# Altium PCB USB下载线mega8贴片.PcbDoc
Units mm, origin at the board's own origin, x right, y up, seen from the top; angles counter-clockwise.
Board outline 152.4 x 101.6 mm, 2 copper layers (Top Layer, Bottom Layer); 17 components, 22 nets, 76 pads, 20 vias.
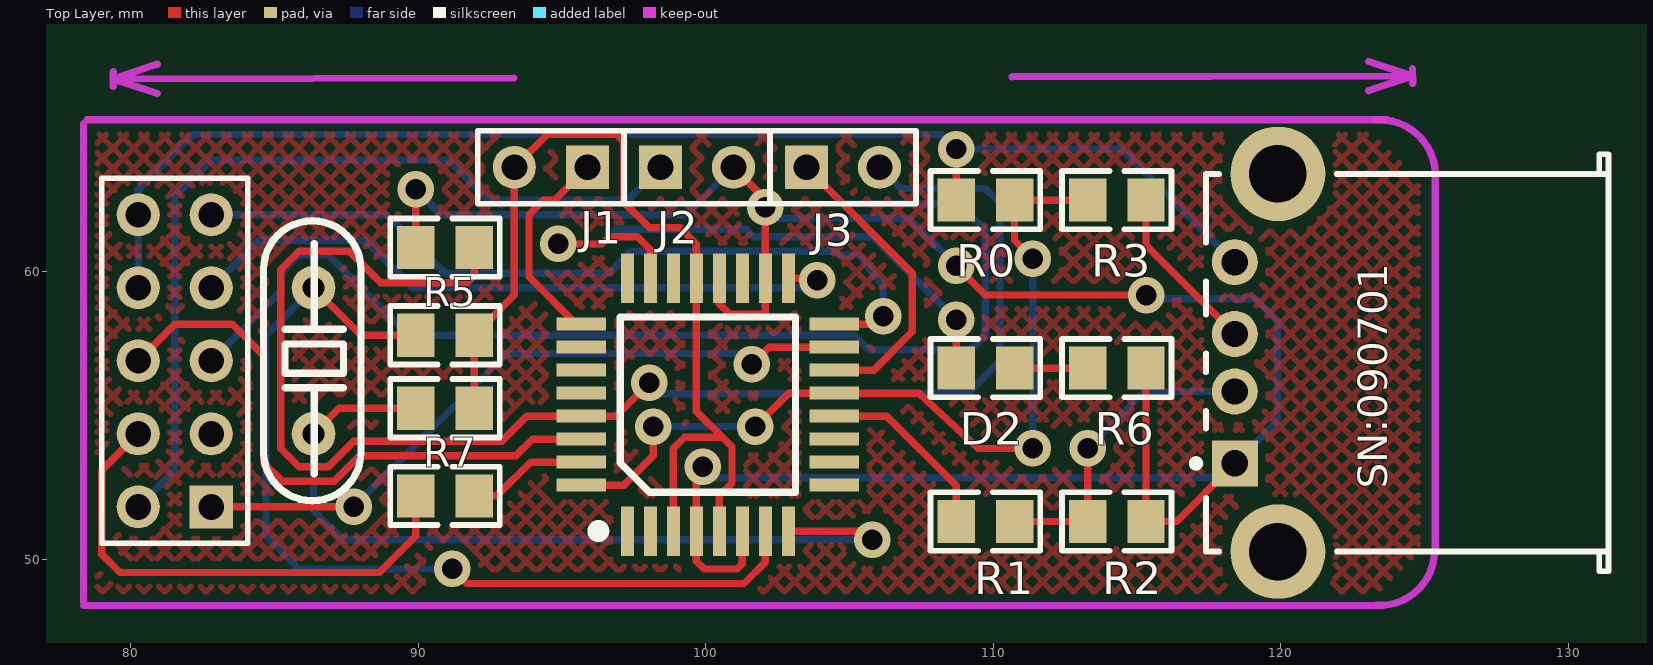
[diagram p0: Top Layer view]
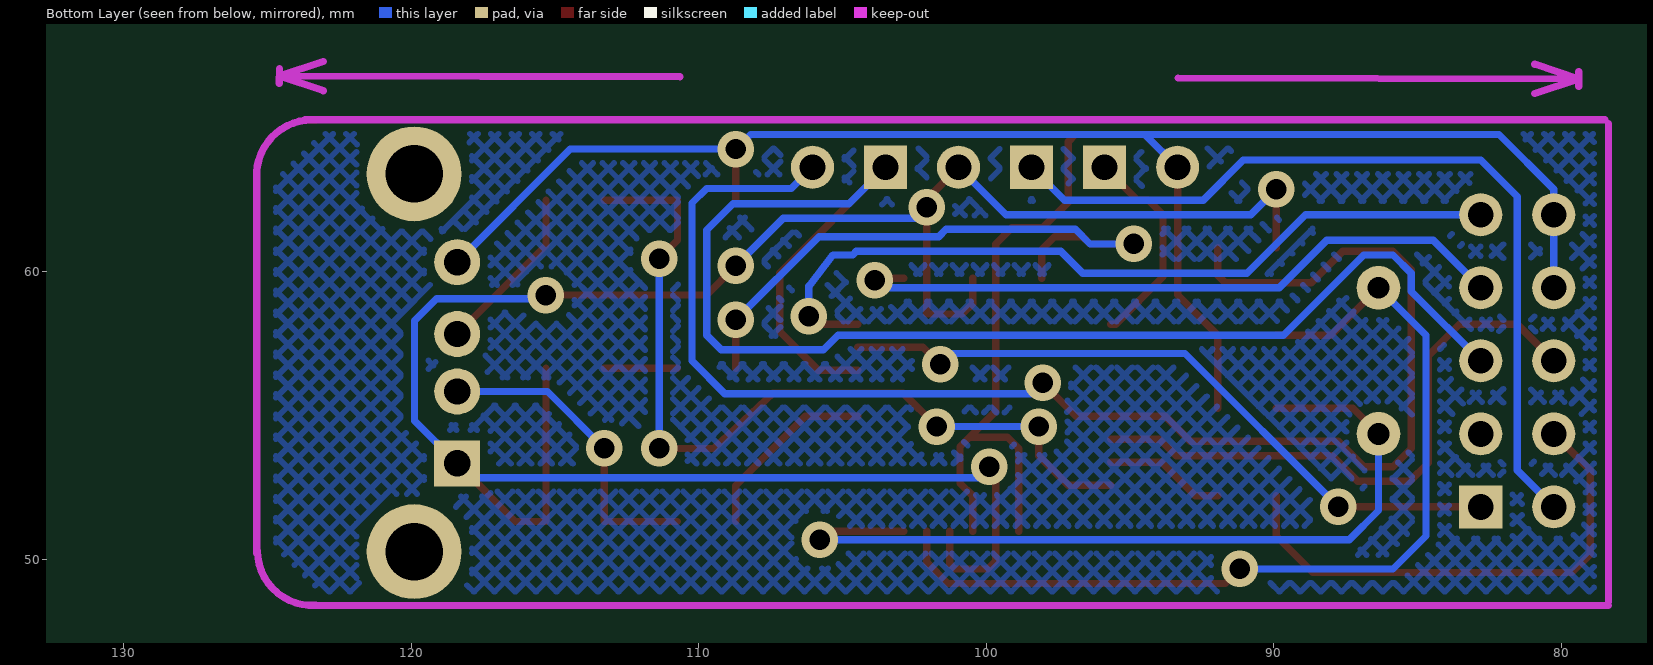
[diagram p1: Bottom Layer view, seen from below]

## Layer stack, top to bottom
Top Layer: signal copper 0.0356
Dielectric: dielectric 0.32, FR-4, Dk 4.8
Bottom Layer: signal copper 0.0356

## Board outline
25.4,25.4 177.8,25.4 177.8,127 25.4,127

## Design rules (kind name [scope] priority, off if disabled: settings)
Clearance [All] p1: gap=0.254
ComponentClearance [All] p1: gap=0.254 collisioncheckmode=3 verticalgap=0.254
PolygonConnect [All] p1: connectstyle=Relief reliefconductorwidth=0.254 reliefentries=4 polygonreliefangle="90 Angle"
RoutingVias [All] p1: holewidth=0.711 width=1.27 viastyle="Through Hole" minholewidth=0.711 minwidth=1.27 maxholewidth=0.711 maxwidth=1.27
SolderMaskExpansion [All] p1: expansion=0.102
TestPointUsage [All] p1: valid=0 allowmultiple=FALSE
Testpoint [All] p1: side=15 testpointundercomponent=TRUE minsize=1.016 maxsize=2.54 preferedsize=1.524 minholesize=0 maxholesize=1.016 preferedholesize=0.813 testpointgrid=0.025 style=1023 order=0123456789
Width [All] p1: maxlimit=0.254 minlimit=0.254 preferedwidth=0.254
17 further rules are at their usual default settings.

## Components (designator, comment, footprint, x,y, rotation, side; value= is the part's Value field where it differs from the comment)
C1 "" TP-0805-R 88.392,59.055 r180 top
C2 "" TP-0805-R 88.392,56.515 r180 top
D2 "" TP-0805-R 107.188,57.912 r180 top
ISP "" HDR2X5 82.804,51.816 r90 top
J1 "CON2" HDR1X2 95.885,63.627 r180 top
J2 "CON2" HDR1X2 98.425,63.627 r0 top
J3 "CON2" HDR1X2 103.505,63.627 r0 top
JP1 "4 HEADER" USB-5V 120.904,60.452 r0 top
mega8 "贴片" TQFP-32_0.8/7×7mm 100.076,55.372 r90 top
R0 "" TP-0805-R 112.268,61.214 r0 top
R1 "" TP-0805-R 107.188,52.578 r180 top
R2 "" TP-0805-R 116.84,50.038 r0 top
R3 "" TP-0805-R 116.84,61.214 r0 top
R5 "" TP-0805-R 88.392,62.103 r180 top
R6 "" TP-0805-R 116.84,55.372 r0 top
R7 "" TP-0805-R 93.472,50.927 r0 top
Y1 "XTAL" 11.0592M 86.36,54.356 r270 top

## Footprints (in the part's own frame and the unit in brackets; to place one, negate y for a bottom-side part, rotate by r counter-clockwise, add the part's x,y. Pads: shape width x height; smd on the part's side, far side on the other; paste and mask are expansions set on the pad)
11.0592M [mil]
  round 60 hole 30: 1(-200,0) 2(0,0)
  silkscreen extent -292,-68 92,65
HDR1X2 [mm] "Connector; Header; 2 Position"
  rect 1.5x1.5 hole 0.9: 1(0,0)
  round 1.5 hole 0.9: 2(2.54,0)
  silkscreen extent -1.27,-1.27 3.81,1.27
HDR2X5 [mm] "Connector; Header; 5x2 Position"
  rect 1.5x1.5 hole 0.9: 1(0,0)
  round 1.5 hole 0.9: 2(0,2.54) 3(2.54,0) 4(2.54,2.54) 5(5.08,0) 6(5.08,2.54) 7(7.62,0) 8(7.62,2.54) 9(10.16,0) 10(10.16,2.54)
  silkscreen extent -1.27,-1.27 11.43,3.81
TP-0805-R [mm]
  rect 1.3x1.5 smd: 1(-3.556,1.27) 2(-1.524,1.27)
  silkscreen extent -4.44,0.25 -0.64,2.29
TQFP-32_0.8/7×7mm [mm] "引脚间距：0.8mm，长度 ：1mm 。主体外形 7×7mm，方形，边角索引"
  rect 1.727x0.457 smd: 1(-4.4,2.8) 2(-4.4,2) 3(-4.4,1.2) 4(-4.4,0.4) 5(-4.4,-0.4) 6(-4.4,-1.2) 7(-4.4,-2) 8(-4.4,-2.8) 17(4.4,-2.8) 18(4.4,-2) 19(4.4,-1.2) 20(4.4,-0.4) 21(4.4,0.4) 22(4.4,1.2) 23(4.4,2) 24(4.4,2.8)
  rect 0.457x1.727 smd: 9(-2.8,-4.4) 10(-2,-4.4) 11(-1.2,-4.4) 12(-0.4,-4.4) 13(0.4,-4.4) 14(1.2,-4.4) 15(2,-4.4) 16(2.8,-4.4) 25(2.8,4.4) 26(2,4.4) 27(1.2,4.4) 28(0.4,4.4) 29(-0.4,4.4) 30(-1.2,4.4) 31(-2,4.4) 32(-2.8,4.4)
  silkscreen extent -4.53,-3.05 3.05,3.94
USB-5V [mm]
  rect 1.6x1.6 hole 0.92: 1(-2.503,-7.123)
  round 1.6 hole 0.92: 2(-2.503,-4.624) 3(-2.503,-2.624) 4(-2.503,-0.124)
  round 3.3 hole 2: 5(-1.002,2.947) 6(-1.002,-10.193)
  silkscreen extent -3.98,-10.87 10.5,3.63

## Part data
C1 C2: library part CAPSMD, "Capacitor SMD1206"
D2: library part "LED Piros", "Piros Led 3mm"
ISP: library part MLW10A, "Header, 5-Pin, Dual row, Right Angle"
J1 J2 J3: "Connector"
JP1: "4 Pin Header"
mega8: library part ATmega8-A, "8 位微处理器/32引脚"
R0 R1 R2 R3 R5 R6 R7: library part RES, "Resistor SMD1206, 1% fémréteg"
Y1: "Crystal Oscillator"

## Via types
v1: diameter 1.27, hole 0.711, Top Layer to Bottom Layer, 20 vias

## Nets (pads, with @x,y where several pads share a name; then routed paths per layer and width w, separated by ;. In a path a pad name is that pad's centre, name@x,y a point inside that pad or via, vN(x,y) a via of type N, cw(c..) or ccw(c..) an arc to the next point about the centre after c; other vN are vias at no path point)
GND: C1.1 C2.1 ISP.8 ISP.10 J1.2 JP1.4 mega8.3 mega8.5 mega8.21 R0.1 | length 81.6
  Top Layer w0.254: C2.1 C1.1 93.345,59.182 J1.2 94.488,64.77 96.901,64.77 97.155,64.516 97.155,62.408 98.044,61.519 99.117,61.519 99.676,60.96 mega8.21 99.676,55.141 100.584,54.233 ; mega8.3 98.876,53.848 99.261,54.233 100.584,54.233 ; mega8.5 100.476,52.201 100.914,52.639 100.914,53.903 100.584,54.233 ; R0.1 v1(108.712,64.262)
  Bottom Layer w0.254: ISP.8 ISP.10 80.264,62.865 82.169,64.77 94.488,64.77 ; J1.2 94.488,64.77 ; JP1.4 114.468,64.262 v1(108.712,64.262) 108.204,64.77 94.488,64.77
MISO: ISP.9 mega8.16 | length 28
  Top Layer w0.254: mega8.16 105.899,58.172 v1(106.172,58.445)
  Bottom Layer w0.254: ISP.9 88.9,61.976 90.932,59.944 96.647,59.944 97.409,60.706 104.521,60.706 104.648,60.579 105.334,60.579 106.172,59.487 v1(106.172,58.445)
MOSI: ISP.1 mega8.15 | length 24.3
  Top Layer w0.254: ISP.1 v1(87.757,51.816) ; v1(101.6,56.769) 102.203,57.372 mega8.15
  Bottom Layer w0.254: v1(87.757,51.816) 93.091,57.15 101.219,57.15 v1(101.6,56.769)
NetD1_1: 
NetD1_2: mega8.23 | length 6
  Top Layer w0.254: v1(94.869,60.96) 96.393,60.96 96.647,61.214 97.63,61.214 98.076,60.768 mega8.23
  Bottom Layer w0.254: v1(94.869,60.96) 96.393,60.96
NetD2_1: D2.1 R6.1 | length 2.5
  Top Layer w0.254: D2.1 R6.1
NetD2_2: D2.2 | length 15.5
  Top Layer w0.254: D2.2 v1(108.712,58.318)
  Bottom Layer w0.254: 96.393,60.96 96.901,61.468 101.404,61.468 101.658,61.214 105.816,61.214 v1(108.712,58.318)
NetISP_2: ISP.2 J2.1 | length 29.8
  Bottom Layer w0.254: ISP.2 81.534,53.086 81.534,62.611 82.804,63.881 91.059,63.881 92.456,62.484 97.282,62.484 J2.1
NetISP_4: ISP.4 R7.1 | length 17.8
  Top Layer w0.254: ISP.4 78.994,53.086 78.994,50.165 79.629,49.53 88.646,49.53 89.916,50.8 R7.1
NetJ1_1: J1.1 mega8.25 | length 7.4
  Top Layer w0.254: mega8.25 95.498,58.172 93.853,59.817 93.853,61.976 94.361,62.484 94.742,62.484 J1.1
NetJ3_2: J3.2 mega8.29 R5.1 | length 52.1
  Top Layer w0.254: R5.1 91.948,59.868 91.694,59.614 88.697,59.614 87.605,60.706 85.852,60.706 85.217,60.071 85.217,53.848 85.852,53.213 86.868,53.213 87.757,54.102 92.907,54.102 93.777,54.972 mega8.29 96.882,54.972 v1(98.044,56.134)
  Bottom Layer w0.254: v1(98.044,56.134) 98.425,55.753 109.093,55.753 110.236,56.896 110.236,62.382 109.728,62.89 106.782,62.89 J3.2
NetJP1_2: JP1.2 R1.1 R2.1 | length 11
  Top Layer w0.254: R1.1 R2.1 v1(113.284,53.848)
  Bottom Layer w0.254: v1(113.284,53.848) 115.264,55.828 JP1.2
NetJP1_3: JP1.3 R3.2 | length 5.9
  Top Layer w0.254: R3.2 115.316,60.914 JP1.3
Netmega8_12: mega8.12 R1.2 | length 6.5
  Top Layer w0.254: mega8.12 106.299,54.972 108.712,52.559 R1.2
PB1: mega8.13 mega8.32 R0.2 R3.1 | length 29.8
  Top Layer w0.254: mega8.32 97.149,52.572 98.171,53.594 v1(98.171,54.61) ; v1(101.727,54.61) 102.889,55.772 mega8.13 107.423,55.772 109.474,53.848 v1(111.379,53.848) ; v1(111.379,60.452) 110.744,61.087 R0.2 R3.1
  Bottom Layer w0.254: v1(98.171,54.61) v1(101.727,54.61) ; v1(111.379,53.848) v1(111.379,60.452)
PB6: C1.2 mega8.7 Y1.1 | length 33
  Top Layer w0.254: Y1.1 88.011,57.785 C1.2 ; v1(91.186,49.657) 91.694,49.149 101.333,49.149 102.076,49.892 mega8.7
  Bottom Layer w0.254: Y1.1 84.709,57.785 84.709,50.8 85.852,49.657 v1(91.186,49.657)
PB7: C2.2 mega8.8 Y1.2 | length 29.5
  Top Layer w0.254: Y1.2 87.249,55.245 C2.2 ; mega8.8 105.492,50.972 v1(105.791,50.673)
  Bottom Layer w0.254: Y1.2 86.36,51.689 87.376,50.673 v1(105.791,50.673)
PD0: ISP.6 mega8.30 | length 21
  Top Layer w0.254: ISP.6 81.534,58.166 83.541,58.166 84.633,57.074 84.633,53.34 85.268,52.705 87.078,52.705 87.967,53.594 93.396,53.594 93.974,54.172 mega8.30
PD1: mega8.31 R7.2 | length 4.2
  Top Layer w0.254: R7.2 92.735,52.197 93.91,53.372 mega8.31
RESET: ISP.5 J3.1 mega8.14 | length 51.7
  Top Layer w0.254: J3.1 107.188,59.944 107.188,57.912 105.848,56.572 mega8.14
  Bottom Layer w0.254: ISP.5 85.217,59.309 85.217,59.944 85.852,60.579 86.868,60.579 89.662,57.785 105.156,57.785 105.664,57.277 109.22,57.277 109.728,57.785 109.728,61.443 108.814,62.357 104.775,62.357 J3.1
SCK: ISP.7 mega8.17 | length 23.7
  Top Layer w0.254: mega8.17 103.804,59.772 v1(103.886,59.69)
  Bottom Layer w0.254: ISP.7 84.455,61.087 88.163,61.087 89.814,59.436 v1@104.14,59.436
VCC: J2.2 JP1.1 mega8.4 mega8.6 mega8.18 mega8.20 R2.2 R5.2 R6.2 | length 83
  Top Layer w0.254: R5.2 v1(89.916,62.865) ; v1(99.898,53.213) 99.676,52.991 mega8.4 99.676,49.93 99.949,49.657 101.092,49.657 101.276,49.841 mega8.6 ; mega8.20 100.476,58.884 100.838,58.522 102.076,58.522 ; J2.2 102.076,62.516 v1(102.076,62.23) 102.076,58.522 ; mega8.18 102.076,58.522 ; v1(108.712,60.198) 109.728,59.182 v1(115.316,59.182) ; R6.2 R2.2 116.381,51.308 JP1.1
  Bottom Layer w0.254: v1(89.916,62.865) 90.805,61.976 99.314,61.976 J2.2 ; v1(99.898,53.213) 100.279,52.832 117.905,52.832 JP1.1 119.888,54.815 119.888,58.293 119.126,59.055 115.443,59.055 v1(115.316,59.182) ; v1(102.076,62.23) 102.457,61.849 107.061,61.849 v1(108.712,60.198)
pads on no net: ISP.3 JP1.5 JP1.6 mega8.1 mega8.2 mega8.9 mega8.10 mega8.11 mega8.19 mega8.22 mega8.24 mega8.26 mega8.27 mega8.28
copper on no net: | length 0.3
  Top Layer w0.254: 123.317,65.278 123.571,65.278

## Polygon pours and split planes (outlines as drawn)
no net on Top Layer (hatched 45Degree grid 0.508 track 0.203): 78.796,64.77 123.119,64.77 124.77,63.119 124.77,50.292 123.246,48.768 78.796,48.768
no net on Bottom Layer (hatched 45Degree grid 0.508 track 0.203): 78.867,64.794 123.063,64.794 124.714,63.143 124.714,50.443 123.444,49.173 123.317,49.046 123.063,48.792 78.867,48.792

## Keep-outs
Keep-Out Layer:
  lines w0.254: 78.359,48.387 123.571,48.387 ; 78.359,48.514 78.359,65.151 ; 78.486,65.278 123.698,65.278 ; 79.397,66.954 79.399,66.446 ; 80.921,67.212 79.398,66.7 ; 80.923,66.196 79.398,66.7 ; 93.334,66.732 79.398,66.7 ; 110.651,66.771 124.587,66.802 ; 123.062,67.307 124.587,66.802 ; 123.064,66.291 124.587,66.802 ; 123.317,48.391 ccw(c123.444,50.292) 125.349,50.292 ; 123.444,65.278 cw(c123.444,63.339) 125.378,63.21 125.378,50.194 ; 124.588,66.548 124.586,67.056
  text "45.1892 (mm)" at 93.59,65.818 h1.52 r0.13

## Silkscreen, mask and mechanical layers (free items; w line width, h text height)
Top Overlay:
  text "SN:090701" at 123.698,52.451 h1.02 r90
Mechanical 1:
  lines w0.254: 76.58,66.806 77.099,65.285 ; 76.718,46.606 77.216,48.133 ; 76.845,65.283 77.353,65.287 ; 76.962,48.131 77.47,48.135 ; 77.081,67.825 77.099,65.285 ; 77.233,45.593 77.216,48.133 ; 77.596,66.813 77.099,65.285 ; 77.734,46.613 77.216,48.133
  text "17.1525 (mm)" at 73.444,64.962 h1.52 r270.39